# EAGLE board OOBD-Tiger_2L_12µmbeta (EAGLE 7.6.0), part 1 of 2
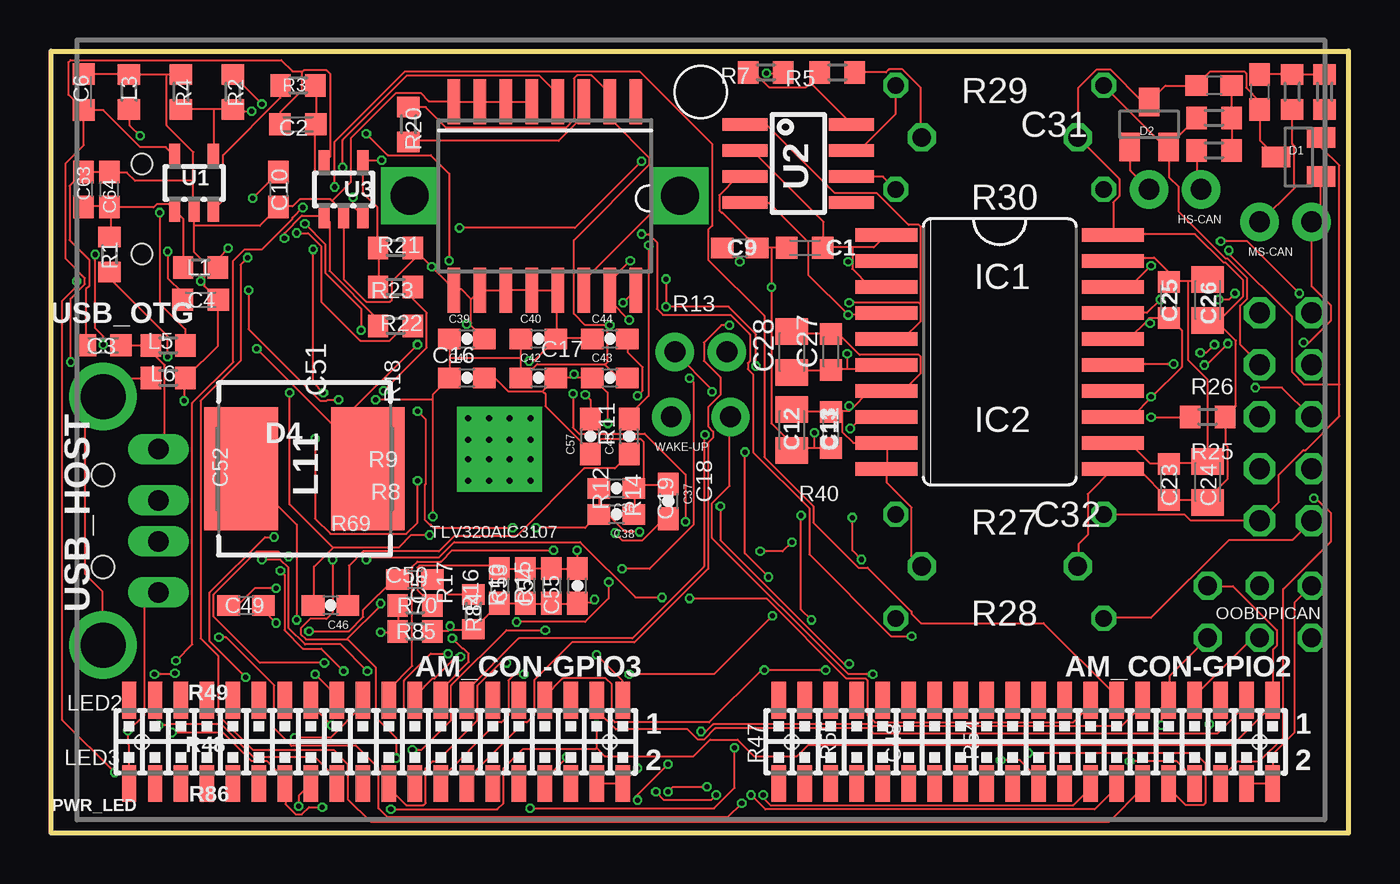
[diagram p0: board, top side]
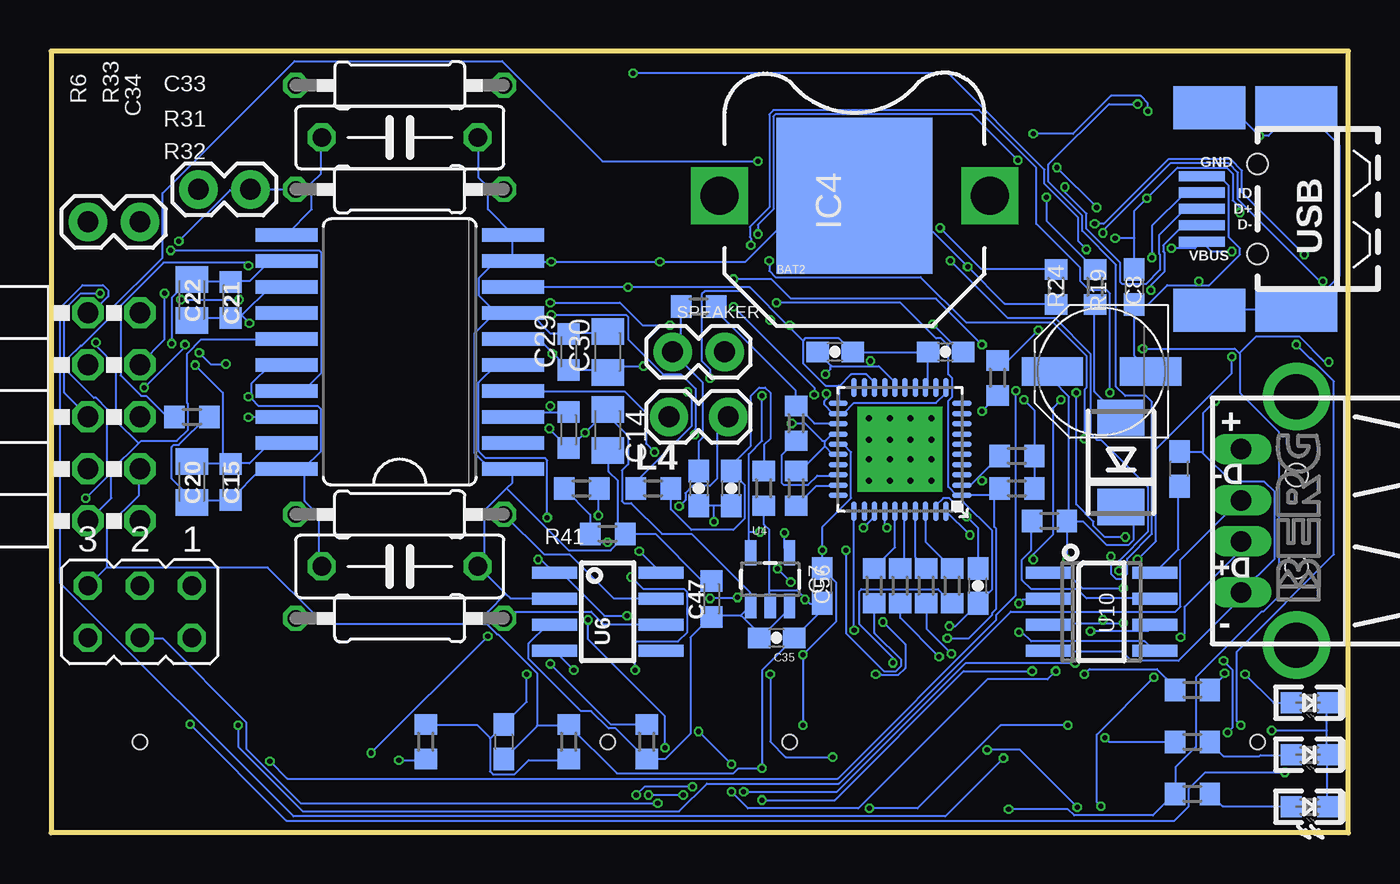
[diagram p1: board, bottom side, seen from below]

Size 63.39 x 38.18 mm. Coordinates in mm from the lower left corner, seen from the top.
Outline: 0,0 63.39,0 63.39,38.18 0,38.18 0,0
Copper layers (1*16): Top 0.012mm / dielectric 1.55mm / Bottom 0.012mm
Design rules "eC_2Layer_PClass8_BaseCopperO12": minimum track width 0.1mm, minimum drill 0.25mm, track to track 0.1mm, track to pad 0.1mm, pad to pad 0.1mm, via to via 0.1mm, smd to smd 0mil, copper to edge 0.25mm, drill to drill 0.35mm, minimum pad ring 0.15mm, minimum via ring 0.1mm, stop-mask expansion 0mil, vias tented up to drill 0.45mm, thermal gap 0.2mm
Net classes: 2 lan_sh: clearance 0.762 mm
tRestrict: area 42.3,10.5 to 50.5,37.3
bRestrict: area 42.4,10.5 to 50.4,37.4

## Footprints (pad centres in the part's own frame; a part is rotated, then mirrored left to right if it is on the bottom)
OOBD-TIGER-AM3352-SOM = smd 0.7 x 1.8: 3-1 27.94,-13.208; 3-2 27.94,-17.272; 3-3 26.67,-13.208; 3-4 26.67,-17.272; 3-5 25.4,-13.208; 3-6 25.4,-17.272; 3-7 24.13,-13.208; 3-8 24.13,-17.272; 3-9 22.86,-13.208; 3-10 22.86,-17.272; 3-11 21.59,-13.208; 3-12 21.59,-17.272; 3-13 20.32,-13.208; 3-14 20.32,-17.272; 3-15 19.05,-13.208; 3-16 19.05,-17.272; 3-17 17.78,-13.208; 3-18 17.78,-17.272; 3-19 16.51,-13.208; 3-20 16.51,-17.272; 3-21 15.24,-13.208; 3-22 15.24,-17.272; 3-23 13.97,-13.208; 3-24 13.97,-17.272; 3-25 12.7,-13.208; 3-26 12.7,-17.272; 3-27 11.43,-13.208; 3-28 11.43,-17.272; 3-29 10.16,-13.208; 3-30 10.16,-17.272; 3-31 8.89,-13.208; 3-32 8.89,-17.272; 3-33 7.62,-13.208; 3-34 7.62,-17.272; 3-35 6.35,-13.208; 3-36 6.35,-17.272; 3-37 5.08,-13.208; 3-38 5.08,-17.272; 3-39 3.81,-13.208; 3-40 3.81,-17.272; 4-1 -3.81,-13.208; 4-2 -3.81,-17.272; 4-3 -5.08,-13.208; 4-4 -5.08,-17.272; 4-5 -6.35,-13.208; 4-6 -6.35,-17.272; 4-7 -7.62,-13.208; 4-8 -7.62,-17.272; 4-9 -8.89,-13.208; 4-10 -8.89,-17.272; 4-11 -10.16,-13.208; 4-12 -10.16,-17.272; 4-13 -11.43,-13.208; 4-14 -11.43,-17.272; 4-15 -12.7,-13.208; 4-16 -12.7,-17.272; 4-17 -13.97,-13.208; 4-18 -13.97,-17.272; 4-19 -15.24,-13.208; 4-20 -15.24,-17.272; 4-21 -16.51,-13.208; 4-22 -16.51,-17.272; 4-23 -17.78,-13.208; 4-24 -17.78,-17.272; 4-25 -19.05,-13.208; 4-26 -19.05,-17.272; 4-27 -20.32,-13.208; 4-28 -20.32,-17.272; 4-29 -21.59,-13.208; 4-30 -21.59,-17.272; 4-31 -22.86,-13.208; 4-32 -22.86,-17.272; 4-33 -24.13,-13.208; 4-34 -24.13,-17.272; 4-35 -25.4,-13.208; 4-36 -25.4,-17.272; 4-37 -26.67,-13.208; 4-38 -26.67,-17.272; 4-39 -27.94,-13.208; 4-40 -27.94,-17.272 | hole 0.7: 27.305,-15.24; 4.445,-15.24; -4.445,-15.24; -27.305,-15.24
BATTCON_12MM_PTH = smd 7.62 x 7.62: GND 0,0 | drill 1.854 square: VCC@1 -6.604,0; VCC@2 6.604,0
C0603K = smd 1.05 x 1.08: 1 -0.875,0; 2 0.875,0
0603-CAP = smd 1.1 x 1: 1 -0.85,0; 2 0.85,0
C0603 = smd 1.1 x 1: 1 -0.85,0; 2 0.85,0
C0805K = smd 1.3 x 1.6: 1 -1,0; 2 1,0
C075-032X103 = drill 0.914 octagon: 1 -3.81,0; 2 3.81,0
PANASONIC_D = smd 3 x 1.4: + 2.4,0; - -2.4,0
SOT23 = smd 1 x 1.4: 1 -0.95,-1.1; 2 0.95,-1.1; 3 0,1.1
DO214AA = smd 1.778 x 2.286: A 2.177,0; C -2.177,0
1X02 = drill 1.016 pad 1.88: 1 0,0; 2 2.54,0
SO20W = smd 0.66 x 3.032: 1 -5.715,-5.529; 2 -4.445,-5.529; 3 -3.175,-5.529; 4 -1.905,-5.529; 5 -0.635,-5.529; 6 0.635,-5.529; 7 1.905,-5.529; 8 3.175,-5.529; 9 4.445,-5.529; 10 5.715,-5.529; 11 5.715,5.529; 12 4.445,5.529; 13 3.175,5.529; 14 1.905,5.529; 15 0.635,5.529; 16 -0.635,5.529; 17 -1.905,5.529; 18 -3.175,5.529; 19 -4.445,5.529; 20 -5.715,5.529
SOIC-16W = smd 0.6 x 2.2: 1 -4.445,-4.6; 2 -3.175,-4.6; 3 -1.905,-4.6; 4 -0.635,-4.6; 5 0.635,-4.6; 6 1.905,-4.6; 7 3.175,-4.6; 8 4.445,-4.6; 9 4.445,4.6; 10 3.175,4.6; 11 1.905,4.6; 12 0.635,4.6; 13 -0.635,4.6; 14 -1.905,4.6; 15 -3.175,4.6; 16 -4.445,4.6
L0603 = smd 1 x 1.1: 1 -0.85,0; 2 0.85,0
8X8MM_3131 = smd 3.6 x 6: 1 -3.1,0; 2 3.1,0
LED_0603 = smd 1.016 x 1.016: A 0.889,0; C -0.889,0
2X05/90 = drill 1.016 octagon: 1 -5.08,-6.35; 2 -5.08,-3.81; 3 -2.54,-6.35; 4 -2.54,-3.81; 5 0,-6.35; 6 0,-3.81; 7 2.54,-6.35; 8 2.54,-3.81; 9 5.08,-6.35; 10 5.08,-3.81
JP3Q = drill 0.914 octagon: 1 -2.54,-1.27; 2 -2.54,1.27; 3 0,-1.27; 4 0,1.27; 5 2.54,-1.27; 6 2.54,1.27
LED-0603 = smd 1.016 x 1.016: A 0.889,0; C -0.889,0
R0603 = smd 1 x 1.1: 1 -0.85,0; 2 0.85,0
0207/10 = drill 0.813 octagon: 1 -5.08,0; 2 5.08,0
QFN40-6X6 = smd 0.95 x 0.28: 1 -3.025,2.25; 2 -3.025,1.75; 3 -3.025,1.25; 4 -3.025,0.75; 5 -3.025,0.25; 6 -3.025,-0.25; 7 -3.025,-0.75; 8 -3.025,-1.25; 9 -3.025,-1.75; 10 -3.025,-2.25; 21 3.025,-2.25; 22 3.025,-1.75; 23 3.025,-1.25; 24 3.025,-0.75; 25 3.025,-0.25; 26 3.025,0.25; 27 3.025,0.75; 28 3.025,1.25; 29 3.025,1.75; 30 3.025,2.25 | smd 0.28 x 0.95: 11 -2.25,-3.025; 12 -1.75,-3.025; 13 -1.25,-3.025; 14 -0.75,-3.025; 15 -0.25,-3.025; 16 0.25,-3.025; 17 0.75,-3.025; 18 1.25,-3.025; 19 1.75,-3.025; 20 2.25,-3.025; 31 2.25,3.025; 32 1.75,3.025; 33 1.25,3.025; 34 0.75,3.025; 35 0.25,3.025; 36 -0.25,3.025; 37 -0.75,3.025; 38 -1.25,3.025; 39 -1.75,3.025; 40 -2.25,3.025 | drill 0.3 pad 1.1 square: EP@1 -1.525,1.525; EP@2 -0.5,1.525; EP@3 0.5,1.525; EP@4 1.525,1.525; EP@5 -1.525,0.475; EP@6 -0.5,0.475; EP@7 0.5,0.475; EP@8 1.525,0.475; EP@9 -1.525,-0.475; EP@10 -0.5,-0.475; EP@11 0.5,-0.475; EP@12 1.525,-0.475; EP@13 -1.525,-1.525; EP@14 -0.5,-1.525; EP@15 0.5,-1.525; EP@16 1.525,-1.525
SOT23-5 = smd 1.2 x 0.55: 1 1.3,-0.95; 2 1.3,0; 3 1.3,0.95; 4 -1.3,0.95; 5 -1.3,-0.95
SO-08 = smd 0.6 x 2.2: 1 -1.905,-2.6; 2 -0.635,-2.6; 3 0.635,-2.6; 4 1.905,-2.6; 5 1.905,2.6; 6 0.635,2.6; 7 -0.635,2.6; 8 -1.905,2.6
SOT23-5' = smd 0.55 x 1.2: 1 -0.95,-1.3; 2 0,-1.3; 3 0.95,-1.3; 4 0.95,1.3; 5 -0.95,1.3
SOIC8 = smd 0.6 x 2.2: 1 -1.905,-2.6; 2 -0.635,-2.6; 3 0.635,-2.6; 4 1.905,-2.6; 5 1.905,2.6; 6 0.635,2.6; 7 -0.635,2.6; 8 -1.905,2.6
USB_PN87520_DEV_PTH = drill 1 long: 1 3.5,2.71; 2 1,2.71; 3 -1,2.71; 4 -3.5,2.71 | drill 2.2: P$1 6.07,0; P$2 -6.07,0 | hole 1.1: -2.25,0; 2.25,0
USB_MINI_9PIN = smd 2.25 x 0.5: D+ 2.706,0; D- 2.706,0.8; GND 2.706,-1.6; ID 2.706,-0.8; VBUS 2.706,1.6 | smd 4 x 2.1: GND1 -1.9,4.95; GND3 -1.9,-4.95 | smd 3.5 x 2.1: GND2 2.35,4.95; GND4 2.35,-4.95 | hole 1: 0,2.2; 0,-2.2
1X02_LOCK = drill 1.016 pad 1.88: 1 -0.178,0; 2 2.718,0

## Placement (x,y rotation side)
AM3352-SOM-EVB-PLATFORM  4XGPH127SMT-02X20(PA-V16X-2X20-LF)  [OOBD-TIGER-AM3352-SOM]  31.75,19.68 0 top
BAT2  3,6V  [BATTCON_12MM_PTH]  24.13,31.11 0 bottom
C1  100nF  [C0603K]  36.83,28.57 0 top
C2  100nF  [C0603K]  12.06,34.61 0 top
C3  100nF  [C0603K]  2.54,23.81 180 top
C4  100nF  [C0603K]  7.3,26.04 0 top
C5  0.1µF  [0603-CAP]  18.1,12.06 90 bottom
C6  100nF  [C0603K]  1.59,36.2 90 top
C7  22µF  [0603-CAP]  25.72,12.06 90 top
C8  22uF/6.3V  [C0603]  10.48,26.67 270 bottom
C9  1uF  [C0603]  33.66,28.57 0 top
C10  22uF/6.3V  [C0603]  11.11,31.43 270 top
C11  100nF  [C0603K]  38.1,19.68 90 top
C12  10µF  [C0805K]  36.2,19.68 90 top
C13  100nF  [C0603K]  38.1,19.68 90 bottom
C14  10µF  [C0805K]  36.2,19.68 270 bottom
C15  100nF  [C0603K]  54.61,17.14 270 bottom
C16  0.1µF  [0603-CAP]  19.68,23.5 0 bottom
C17  10µF  [0603-CAP]  25.08,23.5 180 bottom
C18  0,01µF  [0603-CAP]  31.75,16.83 270 bottom
C19  0,01µF  [0603-CAP]  30.16,16.83 90 bottom
C20  10µF  [C0805K]  56.52,17.14 270 bottom
C21  100nF  [C0603K]  54.61,26.04 270 bottom
C22  10µF  [C0805K]  56.52,26.04 270 bottom
C23  100nF  [C0603K]  54.61,17.14 270 top
C24  10µF  [C0805K]  56.52,17.14 270 top
C25  100nF  [C0603K]  54.61,26.04 270 top
C26  10µF  [C0805K]  56.52,26.04 270 top
C27  100nF  [C0603K]  38.1,23.5 90 top
C28  10µF  [C0805K]  36.2,23.5 90 top
C29  100nF  [C0603K]  38.1,23.5 90 bottom
C30  10µF  [C0805K]  36.2,23.5 90 bottom
C31  NA (AY2221K29Y5SS63L7)  [C075-032X103]  46.35,33.97 0 bottom
C32  NA (AY2221K29Y5SS63L7)  [C075-032X103]  46.35,13.02 0 bottom
C33  NA(10nF)  [C0603]  56.83,36.51 180 top
C34  NA(10nF)  [C0603]  59.05,36.2 270 top
C35  1µf  [0603-CAP]  27.94,9.53 180 bottom
C36  2.2µf  [0603-CAP]  27.62,16.83 180 top
C37  NA (47pF)  [0603-CAP]  30.16,16.19 270 top
C38  1.0µF  [0603-CAP]  27.62,15.56 180 top
C39  0.1µF  [0603-CAP]  20.32,24.13 0 top
C40  10µF  [0603-CAP]  23.81,24.13 0 top
C41  0.1µF  [0603-CAP]  20.32,22.23 0 top
C42  10µF  [0603-CAP]  23.81,22.23 0 top
C43  10µF  [0603-CAP]  27.3,22.23 0 top
C44  1.0µF  [0603-CAP]  27.3,24.13 0 top
C45  0.1µF  [0603-CAP]  28.26,19.37 90 top
C46  10µF  [0603-CAP]  13.65,11.11 180 top
C47  100nF  [C0603K]  31.11,11.43 90 bottom
C48  100nF  [C0603]  41.27,4.45 270 bottom
C49  10nF  [C0603]  9.53,11.11 0 top
C50  3.3nF  [C0603]  17.78,12.38 0 top
C51  470uF/25V/LOWESR/105C  [PANASONIC_D]  12.06,22.54 180 bottom
C52  100nF  [C0603]  8.26,17.78 90 bottom
C53  22uF/6.3V  [C0603]  21.91,12.06 270 top
C54  22uF/6.3V  [C0603]  23.18,12.06 270 top
C55  22uF/6.3V  [C0603]  24.45,12.06 270 top
C56  22uF/6.3V  [C0603]  25.72,12.06 270 bottom
C57  0.1µF  [0603-CAP]  26.35,19.37 90 top
C63  22uF/6.3V  [C0603]  1.59,31.43 90 top
C64  22uF/6.3V  [C0603]  2.86,31.43 90 top
D1  PESD1CAN  [SOT23]  60.96,33.02 90 top
D2  PESD1CAN  [SOT23]  53.66,34.61 0 top
D4  SMBJ16A  [DO214AA]  11.11,18.1 90 bottom
HS-CAN  OPEN  [1X02]  56.2,31.43 0 bottom
IC1  ADM3053M  [SO20W]  46.35,23.5 270 top
IC2  ADM3053M  [SO20W]  46.35,23.5 90 bottom
IC4  DS3231  [SOIC-16W]  24.13,31.11 180 top
L1  FB0805/600R/2A  [L0603]  7.3,27.62 180 top
L3  FB0805/600R/200mA(201209-601)  [L0603]  3.81,36.2 270 top
L4  FB0805/600R/2A  [L0603]  33.97,16.83 0 bottom
L5  FB0805/600R/2A  [L0603]  5.71,23.81 180 top
L6  FB0805/600R/2A  [L0603]  5.71,22.23 180 top
L11  10uH/3.15A/20%  [8X8MM_3131]  12.38,17.78 0 top
LED2  LED/Red/0603  [LED_0603]  1.91,6.35 180 bottom
LED3  LED/Yellow/0603  [LED_0603]  1.91,3.81 180 bottom
MS-CAN  OPEN  [1X02]  59.05,29.84 180 bottom
OOBD2-CONNECTOR  In-Car Diagnostic  [2X05/90]  65.41,20.32 90 bottom
OOBDPICAN  Bridge to PICAN  [JP3Q]  59.05,10.79 180 bottom
PWR_LED  LED/Red/0603  [LED-0603]  1.91,1.27 180 bottom
R1  2.2k/1%  [R0603]  2.86,28.26 90 top
R2  NA  [R0603]  8.89,36.2 90 top
R3  13k/1%  [R0603]  12.06,36.51 180 top
R4  10k  [R0603]  6.35,36.2 270 top
R5  10k  [R0603]  38.42,37.15 0 top
R6  60R  [R0603]  62.23,36.2 270 top
R7  NA  [R0603]  34.92,37.15 0 top
R8  10K  [R0603]  16.19,16.83 0 bottom
R9  10K  [R0603]  16.19,18.41 0 bottom
R10  0  [R0603]  21.91,12.06 90 bottom
R11  0  [R0603]  26.99,20 90 bottom
R12  0  [R0603]  26.99,16.83 90 bottom
R13  0  [R0603]  31.75,25.72 180 bottom
R14  0  [R0603]  28.57,16.83 90 bottom
R15  0  [R0603]  23.18,12.06 90 bottom
R16  0  [R0603]  20.64,12.06 90 bottom
R17  0  [R0603]  19.37,12.06 90 bottom
R18  0  [R0603]  17.14,22.23 270 bottom
R19  6k8k/1%  [R0603]  12.38,26.67 90 bottom
R20  10k  [R0603]  17.46,34.61 90 top
R21  10k  [R0603]  16.83,28.57 180 top
R22  2.2k/1%  [R0603]  16.83,24.77 180 top
R23  NA  [R0603]  16.83,26.67 0 top
R24  10k/1%  [R0603]  14.29,26.67 90 bottom
R25  8k2  [R0603]  56.52,20.32 180 top
R26  8k2  [R0603]  56.52,20.32 180 bottom
R27  0R  [0207/10]  46.35,15.56 0 bottom
R28  0R  [0207/10]  46.35,10.48 0 bottom
R29  0R  [0207/10]  46.35,36.51 180 bottom
R30  0R  [0207/10]  46.35,31.43 0 bottom
R31  60R  [R0603]  56.83,34.92 180 top
R32  60R  [R0603]  56.83,33.34 180 top
R33  60R  [R0603]  60.64,36.2 270 top
R40  NA  [R0603]  37.47,16.83 0 bottom
R41  10k  [R0603]  36.2,14.61 0 bottom
R47  2.2k/1%  [R0603]  34.29,4.45 270 bottom
R48  2.2k/1%  [R0603]  7.62,4.45 0 bottom
R49  2.2k/1%  [R0603]  7.62,6.99 0 bottom
R54  49.9R/1%  [R0603]  45.09,4.45 90 bottom
R55  NA  [R0603]  38.1,4.45 90 bottom
R69  10k  [R0603]  14.61,15.24 180 bottom
R70  4.99k/1%  [R0603]  17.78,11.11 0 top
R84  2.2k/1%  [R0603]  20.64,10.79 270 top
R85  1.05k/1%  [R0603]  17.78,9.84 0 top
R86  2.2k/1%  [R0603]  7.62,1.91 0 bottom
SPEAKER  LS1  [1X02]  30.48,23.5 180 bottom
TLV320AIC3107  Audio-Amplifier  [QFN40-6X6]  21.91,18.73 180 bottom
U1  SY6280  [SOT23-5]  6.99,31.75 270 top
U2  SN65HVD230(SO8)  [SO-08]  36.51,32.7 270 top
U3  SY6280  [SOT23-5]  14.29,31.43 270 top
U4  TLV70215  [SOT23-5']  28.26,12.38 0 bottom
U6  SN65HVD230(SO8)  [SO-08]  36.2,10.79 270 bottom
U10  MP1482DS  [SOIC8]  12.06,10.79 270 bottom
USB_HOST  USB_A_VERTICAL  [USB_PN87520_DEV_PTH]  2.54,15.24 90 bottom
USB_OTG  USB-OTG  [USB_MINI_9PIN]  4.45,30.48 180 bottom
WAKE-UP  Open  [1X02_LOCK]  30.48,20.32 180 bottom

## Library data of the parts
AM3352-SOM-EVB-PLATFORM = OOBDtiger-Connector
BAT2 HS-CAN MS-CAN SPEAKER WAKE-UP = SparkFun
C1-C4 C6 C8-C15 C20-C32 C47-C50 C52-C56 C63 C64 L1 L3-L6 R1-R5 R7 R19-R30 R40 R41 R47-R49 R54 R55 R69 R70 R84-R86 = rcl
C5 C7 C18 C19 C37 C38 C43-C46 C57 = SparkFun-Passives; MANEX: 123-0001115
C16 C17 C35 C36 C39-C42 = SparkFun-Passives; MANEX: 123-0001032
C33 C34 R6 R10-R18 R31-R33 = resistor
C51 = SparkFun-Capacitors; PROD_ID: CAP-10547
D1 D2 = Industrialberry
D4 L11 = OLIMEX_DISCRET
IC1 IC2 = ADM3053
IC4 = DS3231_industrialberry
LED2 LED3 PWR_LED = DOUBLE-SIDE
OOBD2-CONNECTOR = pinhead
OOBDPICAN = jumper
R8 R9 = resistor; MANEX: 110-0002014
TLV320AIC3107 = TLV320AIC3107
U1 U3 U10 = OLIMEX_IC
U2 U6 = arm
U4 = SparkFun-PowerIC
USB_HOST USB_OTG = OLIMEX_CONNECTORS

## Nets
3V3 [PWR]: AM3352-SOM-EVB-PLATFORM.3-3 AM3352-SOM-EVB-PLATFORM.4-3
+3V3: C1.1 C5.2 C9.2 C11.1 C12.1 C13.1 C14.1 C16.1 C17.1 C35.2 C39.1 C40.1 C41.1 C42.1 C43.2 C47.1 IC1.8 IC2.8 IC4.2 R8.2 R9.2 R20.2 R47.2 TLV320AIC3107.12 TLV320AIC3107.13 TLV320AIC3107.18 TLV320AIC3107.21 U2.3 U4.1 U4.3 U6.3
+5V: AM3352-SOM-EVB-PLATFORM.3-1 AM3352-SOM-EVB-PLATFORM.4-1 C2.1 C6.1 C7.2 C27.1 C28.1 C29.1 C30.1 C53.1 C54.1 C55.1 C56.1 C57.2 IC1.6 IC2.6 L11.2 OOBDPICAN.1 R70.2 R86.1 TLV320AIC3107.25 U1.5 U3.5
+5V_OTG_PWR: C4.1 L1.1 USB_OTG.VBUS
+12V: C51.+ D4.C OOBD2-CONNECTOR.10 R69.1 U10.2
AGND: C18.2 C19.1 TLV320AIC3107.11 TLV320AIC3107.22
AUD_BCLK: AM3352-SOM-EVB-PLATFORM.4-19 R15.1
AUD_DIN: AM3352-SOM-EVB-PLATFORM.4-18 R16.1
AUD_DOUT: AM3352-SOM-EVB-PLATFORM.4-20 R17.1
AUD_MCLK: AM3352-SOM-EVB-PLATFORM.4-24 R18.1
AUD_WCLK: AM3352-SOM-EVB-PLATFORM.4-17 R10.1
CAN0_H: D1.2 IC2.17 OOBD2-CONNECTOR.1 R6.2 R27.1
CAN0_L: D1.1 IC2.15 MS-CAN.2 OOBD2-CONNECTOR.2 R28.1
CAN1_H: D2.2 IC1.17 OOBD2-CONNECTOR.7 R29.2 R31.2
CAN1_L: D2.1 HS-CAN.2 IC1.15 OOBD2-CONNECTOR.6 R30.1
DCAN0_RX: AM3352-SOM-EVB-PLATFORM.4-7 IC2.4 U6.4
DCAN0_TX: AM3352-SOM-EVB-PLATFORM.4-8 IC2.5 U6.1
DCAN1_RX: AM3352-SOM-EVB-PLATFORM.4-13 IC1.4 U2.4
DCAN1_TX: AM3352-SOM-EVB-PLATFORM.4-14 IC1.5 U2.1
DVDD: C36.2 C38.2 C44.2 TLV320AIC3107.33 U4.5
EXT_WAKEUP: AM3352-SOM-EVB-PLATFORM.3-20 R54.1
GND [PWR]: AM3352-SOM-EVB-PLATFORM.3-2 AM3352-SOM-EVB-PLATFORM.3-4 AM3352-SOM-EVB-PLATFORM.4-2 AM3352-SOM-EVB-PLATFORM.4-4 AM3352-SOM-EVB-PLATFORM.4-40 BAT2.GND C1.2 C2.2 C3.2 C4.2 C5.1 C6.2 C7.1 C8.2 C9.1 C10.2 C11.2 C12.2 C13.2 C14.2 C16.2 C17.2 C27.2 C28.2 C29.2 C30.2 C31.2 C32.2 C35.1 C36.1 C37.1 C38.1 C39.2 C40.2 C41.2 C42.2 C43.1 C44.1 C47.2 C48.2 C51.- C52.2 C53.2 C54.2 C55.2 C56.2 C57.1 C63.2 C64.2 D4.A IC1.1 IC1.3 IC1.7 IC1.9 IC1.10 IC2.1 IC2.3 IC2.7 IC2.9 IC2.10 IC4.5 IC4.6 IC4.7 IC4.8 IC4.9 IC4.10 IC4.11 IC4.12 IC4.13 L3.1 L6.1 LED2.C LED3.C OOBD2-CONNECTOR.3 OOBDPICAN.5 PWR_LED.C R3.1 R4.1 R5.2 R12.2 R14.1 R19.1 R21.1 R24.1 R41.2 R55.2 R84.2 R85.2 TLV320AIC3107.16 TLV320AIC3107.24 TLV320AIC3107.26 TLV320AIC3107.39 U1.2 U2.2 U3.2 U4.2 U6.2 U10.4 USB_HOST.4 USB_OTG.GND
GND1 [PWR]: C45.1 C46.1
GNDA [PWR]: C15.2 C20.2 C21.2 C22.2 C23.2 C24.2 C25.2 C26.2 C31.1 C32.1 C33.2 C34.2 D1.3 D2.3 IC1.11 IC1.13 IC1.16 IC1.20 IC2.11 IC2.13 IC2.16 IC2.20 R25.1 R26.1
HS-CAN_RS: AM3352-SOM-EVB-PLATFORM.4-26 R7.2
I2C0-SCL: AM3352-SOM-EVB-PLATFORM.4-15 IC4.16 R8.1 TLV320AIC3107.1
I2C0-SDA: AM3352-SOM-EVB-PLATFORM.4-16 IC4.15 R9.1 TLV320AIC3107.2
LED1: AM3352-SOM-EVB-PLATFORM.4-21 R48.1
LED2: AM3352-SOM-EVB-PLATFORM.4-23 R49.1
MS-CAN_RS: AM3352-SOM-EVB-PLATFORM.4-25 R40.2
N$1: LED2.A R49.2
N$2: C33.1 R31.1 R32.1
N$3: R19.2 U3.3
N$4: C52.1 U10.8
N$5: R5.1 R7.1 U2.8
N$6: R69.2 U10.7
N$7: C49.1 U10.1
N$8: C49.2 L11.1 U10.3
N$9: C50.1 U10.6
N$10: C34.1 R6.1 R33.1
N$11: C50.2 R84.1
N$12: C37.2 U4.4
N$13: C8.1 C10.1 L5.1 R22.2 U3.1
N$14: C19.2 L4.2 R14.2
N$15: C18.1 R13.2 SPEAKER.2
N$16: L4.1 SPEAKER.1
N$18: R11.2 R13.1 TLV320AIC3107.23
N$19: R11.1 TLV320AIC3107.28
N$20: R12.1 TLV320AIC3107.29
N$21: C45.2 C46.2 TLV320AIC3107.40
N$22: R17.2 TLV320AIC3107.38
N$23: R16.2 TLV320AIC3107.37
N$24: R15.2 TLV320AIC3107.35
N$25: R10.2 TLV320AIC3107.36
N$26: R18.2 TLV320AIC3107.34
N$27: IC4.3 R20.1
N$28: C3.1 L5.2 USB_HOST.1
N$29: L6.2 USB_HOST.P$1 USB_HOST.P$2
N$30: HS-CAN.1 R32.2
N$31: C23.1 C24.1 C25.1 C26.1 IC1.12 IC1.19
N$32: MS-CAN.1 R33.2
N$33: IC2.18 R25.2
N$40: R27.2 U6.7
N$41: R30.2 U2.6
N$42: R28.2 U6.6
N$43: R47.1 WAKE-UP.1
N$44: C48.1 R54.2 R55.1 WAKE-UP.2
N$45: R29.1 U2.7
N$50: C15.1 C20.1 C21.1 C22.1 IC2.12 IC2.19
N$52: IC1.18 R26.2
N$62: R70.1 R85.1 U10.5
N$80: R40.1 R41.1 U6.8
N$99: R3.2 U1.3
N$100: C63.1 C64.1 L1.2 R1.2 U1.1
N$129: PWR_LED.A R86.2
N$231: LED3.A R48.2
N$266: L3.2 USB_OTG.GND1 USB_OTG.GND2 USB_OTG.GND3 USB_OTG.GND4
SYS_RESETN: AM3352-SOM-EVB-PLATFORM.4-28 IC4.4 TLV320AIC3107.31
USB0_CE: AM3352-SOM-EVB-PLATFORM.3-14 R2.2
USB0_DM: AM3352-SOM-EVB-PLATFORM.3-15 USB_OTG.D-
USB0_DP: AM3352-SOM-EVB-PLATFORM.3-13 USB_OTG.D+
USB0_DRV: AM3352-SOM-EVB-PLATFORM.3-16 R2.1 R4.2 U1.4
USB0_ID: AM3352-SOM-EVB-PLATFORM.3-12 USB_OTG.ID
USB0_VBUS: AM3352-SOM-EVB-PLATFORM.3-11 R1.1
USB1_CE: AM3352-SOM-EVB-PLATFORM.3-8 R23.2
USB1_DM: AM3352-SOM-EVB-PLATFORM.3-9 OOBDPICAN.2 USB_HOST.2
USB1_DP: AM3352-SOM-EVB-PLATFORM.3-7 OOBDPICAN.4 USB_HOST.3
USB1_DRV: AM3352-SOM-EVB-PLATFORM.3-10 R21.2 R23.1 U3.4
USB1_ID: AM3352-SOM-EVB-PLATFORM.3-6 R24.2
USB1_VBUS: AM3352-SOM-EVB-PLATFORM.3-5 R22.1
VBAT: BAT2.VCC@1 IC4.14